# EAGLE board tdlf_03_05_2021_server_top (EAGLE 9.6.2)
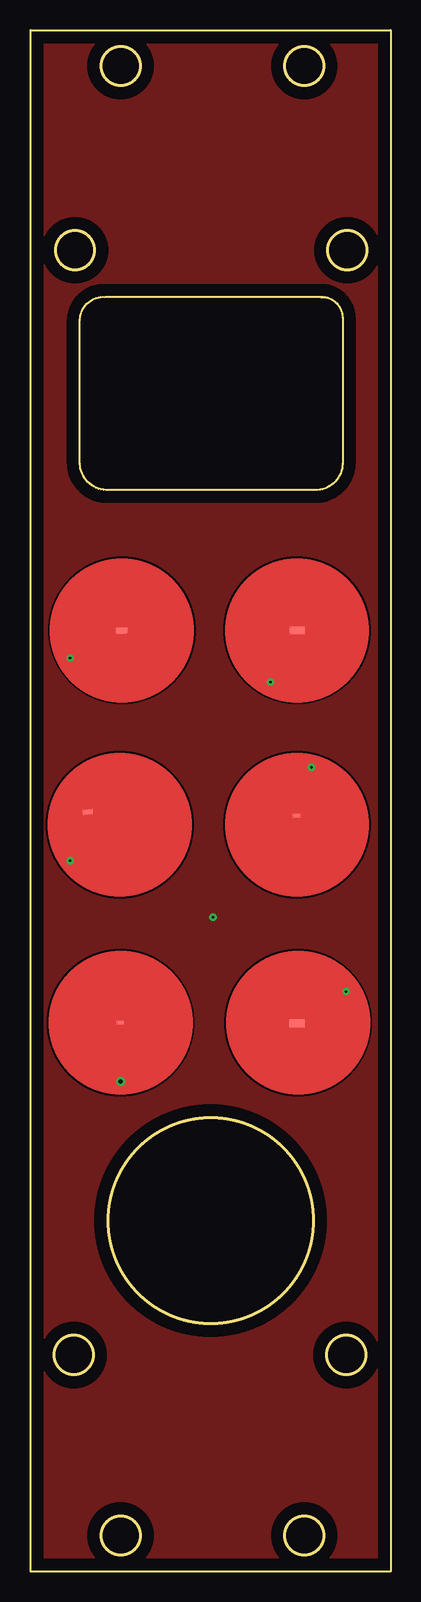
[diagram p0: board, top side]
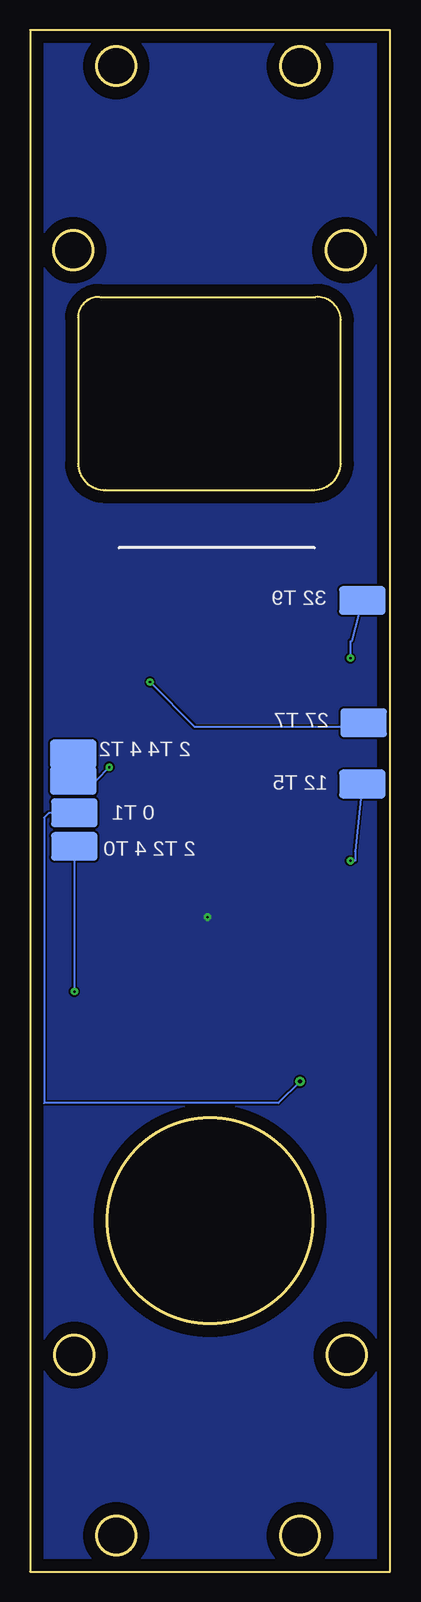
[diagram p1: board, bottom side, seen from below]

Size 30 x 128.5 mm. Coordinates in mm from the lower left corner, seen from the top.
Outline: 24.2,106.25 6.2,106.25 arc90 4.1,104.35 4.1,92.35 arc90 6.5,90.15 23.7,90.15 arc90 26,92.35 26,104.55 arc90 24.2,106.25
Outline: 24.2,106.25 24.3,106.25
Outline: 0,0 0,128.5 30,128.5 30,0 0,0
Outline: circle at 26.4,110.15 radius 1.62
Outline: circle at 3.7,110.15 radius 1.62
Outline: circle at 3.6,18.05 radius 1.62
Outline: circle at 26.3,18.05 radius 1.62
Outline: circle at 15,29.25 radius 8.54
Outline: circle at 22.81,125.5 radius 1.62
Outline: circle at 7.5,125.5 radius 1.62
Outline: circle at 22.81,3 radius 1.62
Outline: circle at 7.5,3 radius 1.62
Copper layers (1*16): Top 0.035mm / dielectric 1.5mm / Bottom 0.035mm
Design rules "default": minimum track width 6mil, minimum drill 0.35mm, track to track 6mil, track to pad 6mil, pad to pad 6mil, via to via 6mil, smd to smd 6mil, copper to edge 40mil, drill to drill 6mil, minimum pad ring 10mil, minimum via ring 8mil, stop-mask expansion 4mil, vias tented up to drill 0mil, thermal gap 10mil

## Footprints (pad centres in the part's own frame; a part is rotated, then mirrored left to right if it is on the bottom)
TDLF_CAP_02 = smd 0.813 x 0.406: P$1 -2.55,2.1
TDLF_CAP_PLUS = smd 1.016 x 0.508: P$1 0,0
LUXEON-PAD = smd 3.9 x 2.4: P$1 0,0
TDLF_CAP_MOINS = smd 1.27 x 0.635: P$1 0.025,0
TDLF_CAP_SPIRAL = smd 0.61 x 0.305: P$1 -0.025,0
TDLF_CAP_KOPIMI = smd 0.61 x 0.305: P$1 -0.051,0.762
TDLF_CAP_ACHTUNG = smd 1.27 x 0.66: P$1 -0.102,-0.051

## Placement (x,y rotation side)
CAP_MUSH  MUSH  [TDLF_CAP_02]  7.5,61.45 5 top
CAP_PLUS  [TDLF_CAP_PLUS]  7.6,78.45 0 top
JP1  [LUXEON-PAD]  2.3,65.65 0 bottom
JP2  [LUXEON-PAD]  2.2,70.75 0 bottom
JP3  [LUXEON-PAD]  2.3,80.95 0 bottom
JP4  [LUXEON-PAD]  26.3,63.25 0 bottom
JP5  [LUXEON-PAD]  26.4,65.95 0 bottom
JP6  [LUXEON-PAD]  26.4,68.15 0 bottom
JP7  [LUXEON-PAD]  26.3,60.45 0 bottom
U$1  [TDLF_CAP_MOINS]  22.2,78.45 0 top
U$2  [TDLF_CAP_SPIRAL]  7.5,45.75 0 top
U$3  [TDLF_CAP_KOPIMI]  22.2,62.25 0 top
U$4  [TDLF_CAP_ACHTUNG]  22.3,45.75 0 top

## Library data of the parts
CAP_MUSH CAP_PLUS U$1-U$4 = alx_lib
JP1-JP7 = SparkFun-Connectors

## Nets
CHAMPI: CAP_MUSH.P$1 JP1.P$1
KOPIMI: JP5.P$1 JP6.P$1 U$3.P$1
MOINS: JP2.P$1 U$1.P$1
N$1: JP7.P$1 U$4.P$1
PLUS: CAP_PLUS.P$1 JP3.P$1
SPIRAL: JP4.P$1 U$2.P$1

## Tracks (layer width: path | path; a pad name or v marks a point on that pad's centre or on a via)
CHAMPI  (via drill 0.2)
  Top 0.152: CAP_MUSH.P$1 4.78,60.73 v3.3,59.25
  Bottom 0.152: JP1.P$1 2.9,60.05 2.9,59.25 v3.3,59.25
GND  (via drill 0.2)
  other vias: 15.2,54.55
  pour Bottom: 0,128.45 29.9,128.45 30,128.35 30,0.35 29.8,0.15 0,0.15
  pour Top: 0.2,128.46 29.9,128.16 29.9,0.25 0.2,0.25
KOPIMI  (via drill 0.2)
  Top 0.152: v23.4,67.05 22.6,66.25 22.6,63.46 U$3.P$1
  Bottom 0.152: v23.4,67.05 24.5,65.95 JP5.P$1 JP6.P$1
MOINS  (via drill 0.2)
  Top 0.152: v20,74.15 20,76.22 U$1.P$1
  Bottom 0.152: JP2.P$1 2.55,70.4 16.25,70.4 v20,74.15
N$1  (via drill 0.2)
  Top 0.152: v26.3,48.35 23.65,45.7 U$4.P$1
  Bottom 0.152: JP7.P$1 v26.3,48.35
PLUS  (via drill 0.2)
  Top 0.152: CAP_PLUS.P$1 5.6,78.45 v3.3,76.15
  Bottom 0.152: JP3.P$1 3.2,77.55 3.3,77.55 v3.3,76.15
SPIRAL  (via drill 0.35)
  Top 0.152: v7.5,40.85 7.47,40.88 U$2.P$1
  Bottom 0.152: JP4.P$1 28.43,63.25 28.83,62.85 28.83,39.05 9.3,39.05 v7.5,40.85

## Text on the board
bNames: 32 T9 | 27 T7 | 2 T4 4 T2 | 12 T5 | 0 T1 | 2 T2 4 T0
tStop: Technologies / de la fête | v 0.2